# Altium PCB PCB1.PcbDoc
Units mm, origin at the board's own origin, x right, y up, seen from the top; angles counter-clockwise.
Board outline 44.15 x 26.07 mm, 2 copper layers (Top Layer, Bottom Layer); 33 components, 28 nets, 109 pads, 16 vias.
Unrouted connection lines stored in the file: 23.
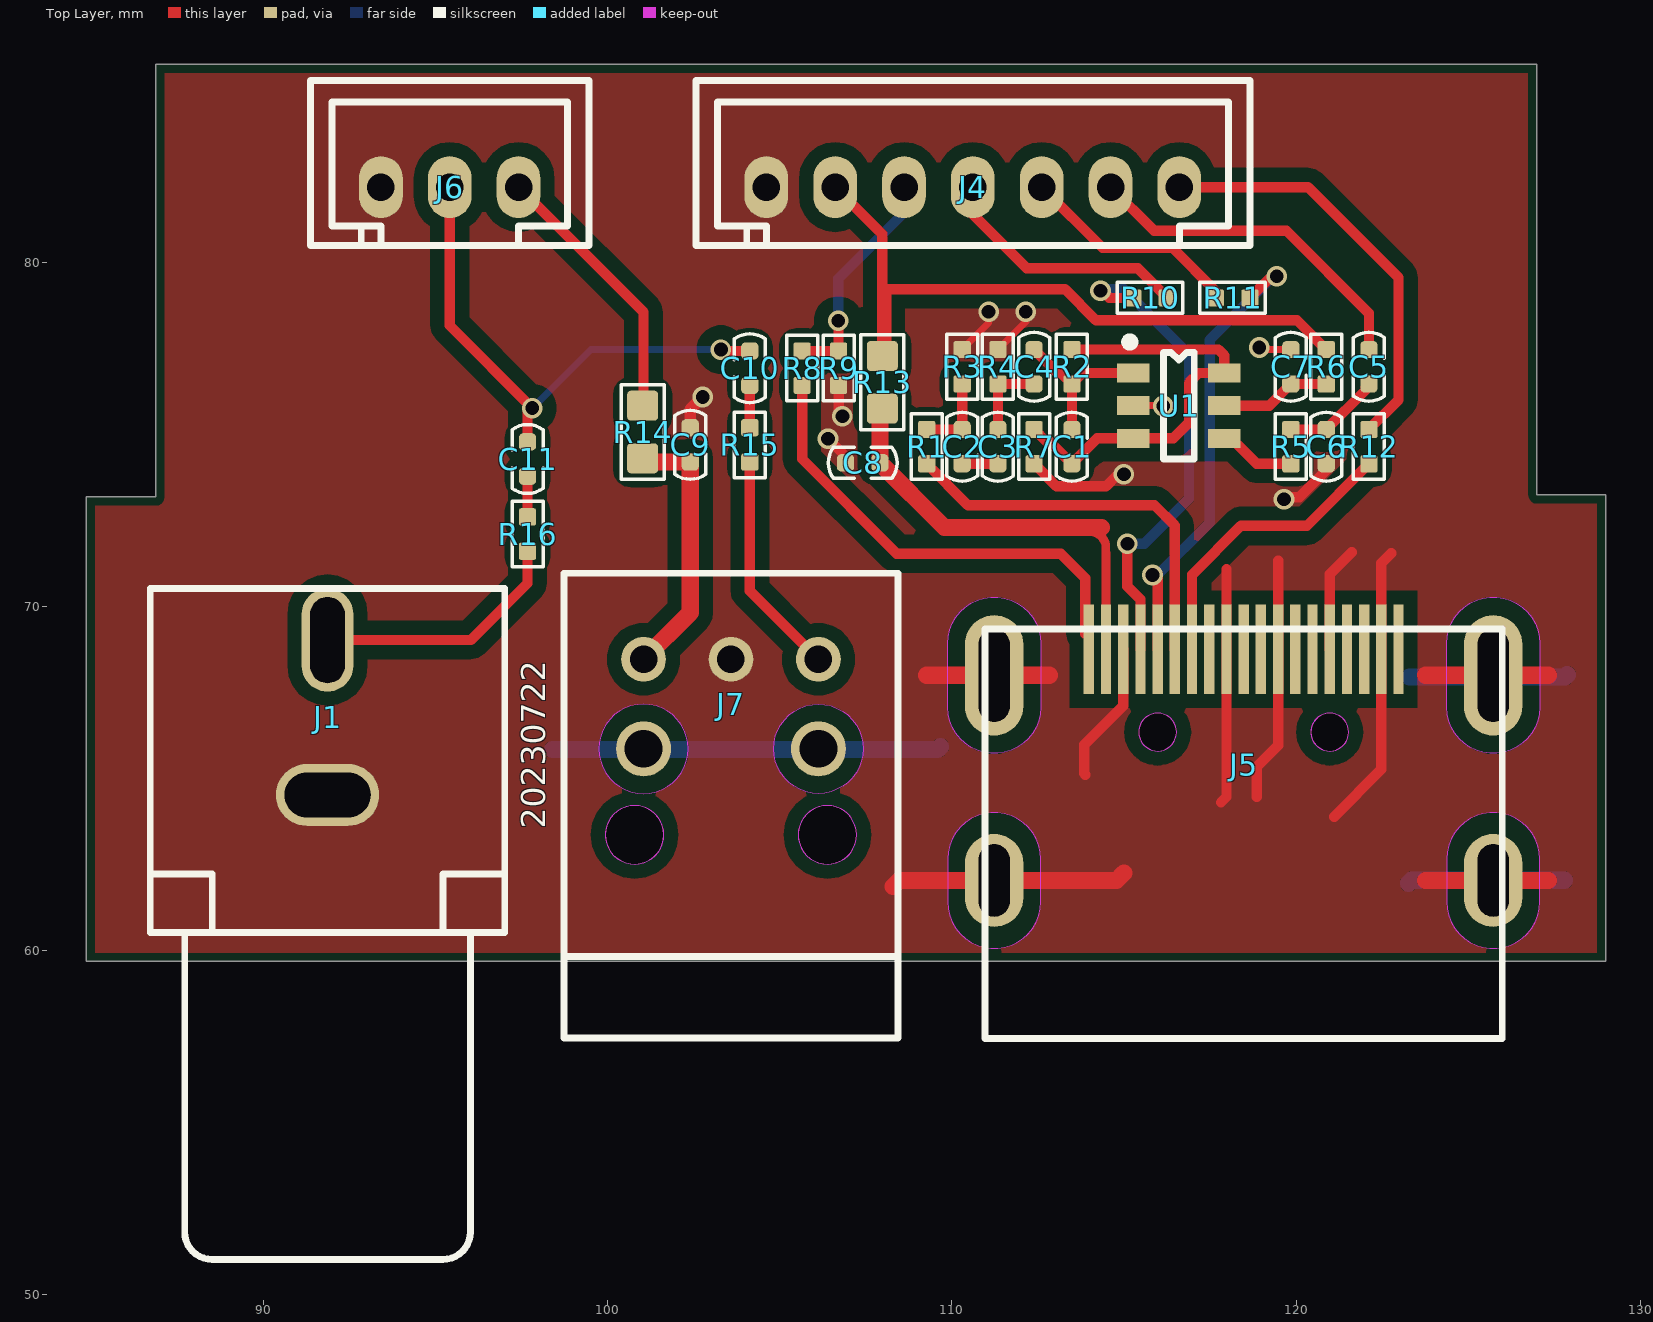
[diagram p0: Top Layer view]
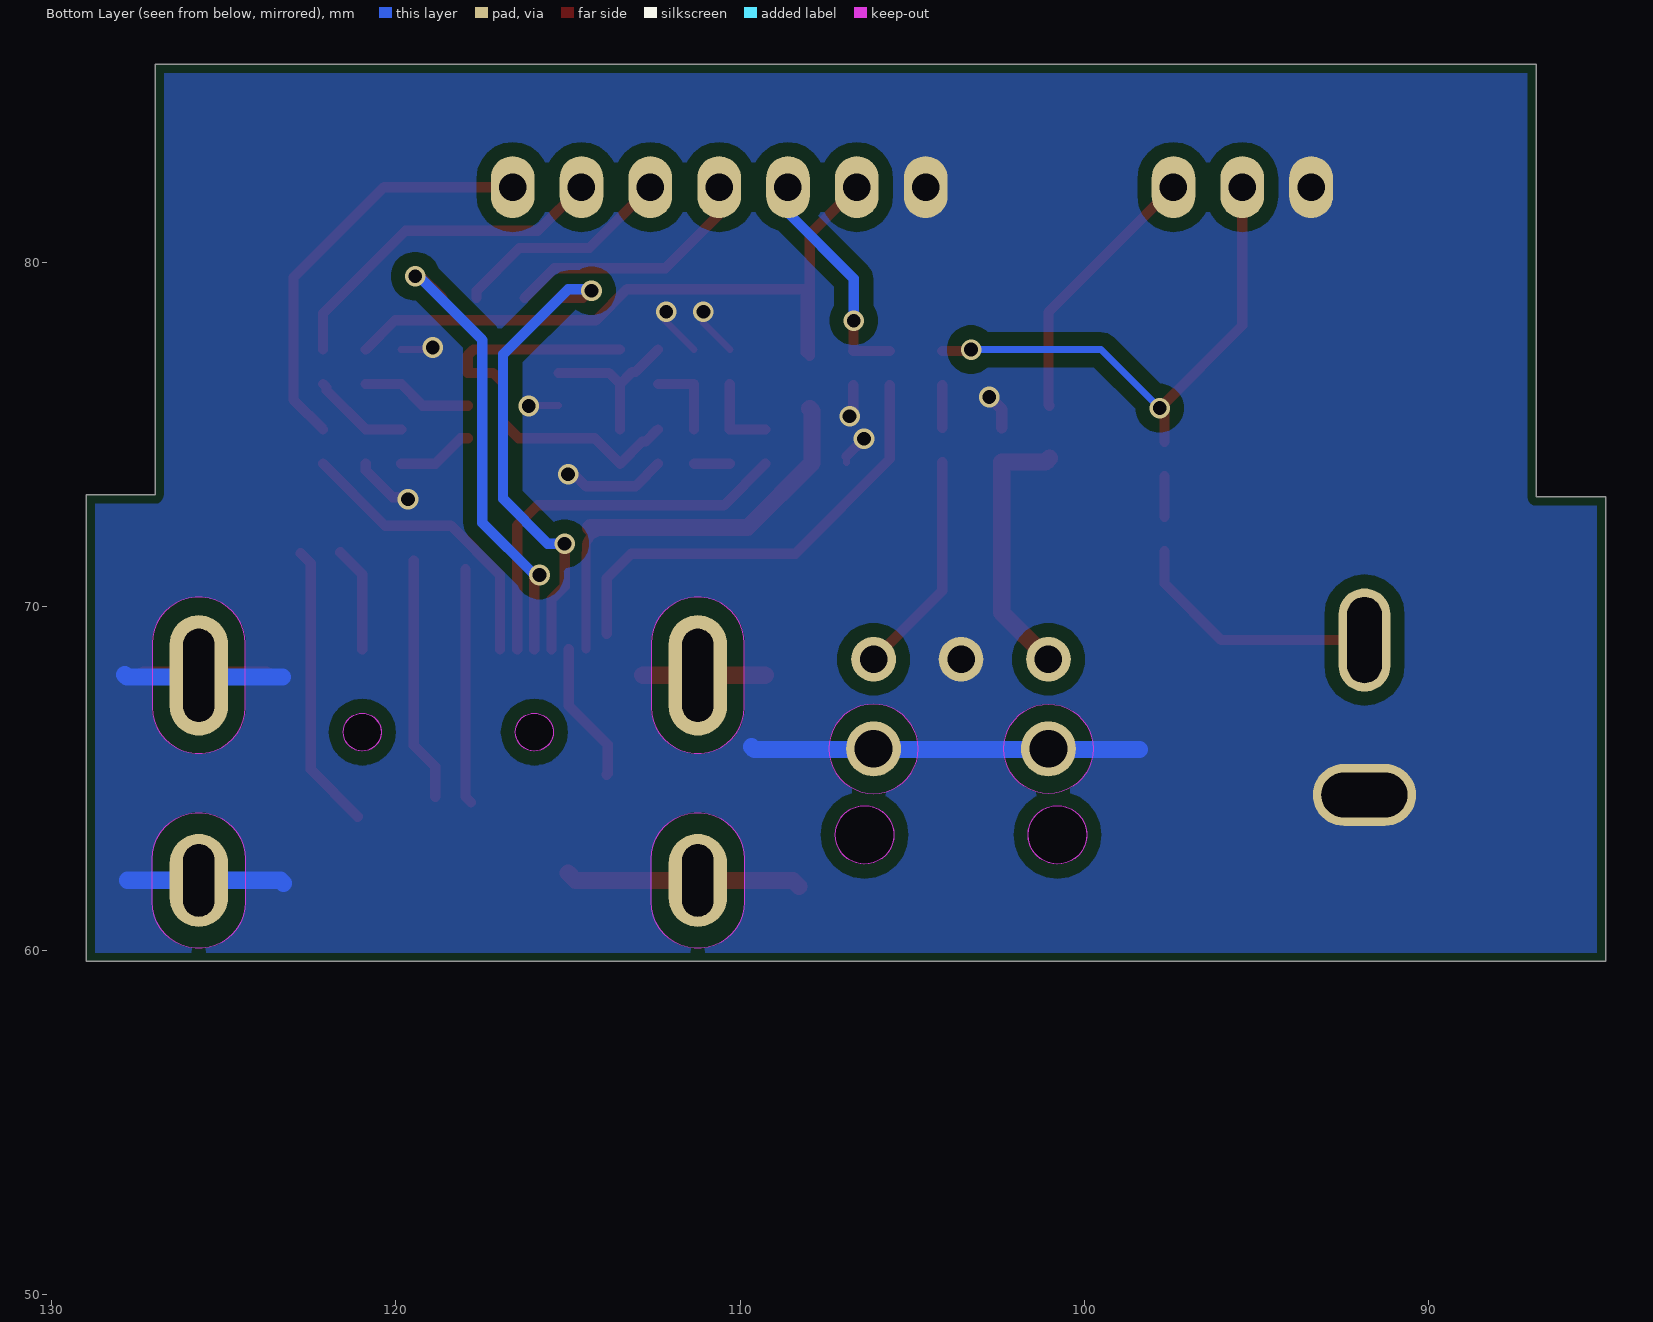
[diagram p1: Bottom Layer view, seen from below]

## Layer stack, top to bottom
Top Solder: solder mask 0.0102, Solder Resist, Dk 3.5
Top Layer: signal copper 0.0356
Dielectric 1: dielectric 0.32, FR-4, Dk 4.8
Bottom Layer: signal copper 0.0356
Bottom Solder: solder mask 0.0102, Solder Resist, Dk 3.5

## Board outline
84.849,61.09 84.849,73.19 86.87,73.19 86.87,85.76 126.999,85.76 126.999,73.25 128.999,73.25 128.999,59.69 84.849,59.69

## Design rules (kind name [scope] priority, off if disabled: settings)
BoardOutlineClearance [All] p1: gap=0.254 ignorepadtopadclearanceinfootprint=FALSE except(0: Arc-SplitContinuation Track-SplitContinuation SMDPad-SplitContinuation THPad-SplitContinuation Via-SplitContinuation Fill-SplitContinuation Poly-SplitContinuation Region-SplitContinuation Text-SplitContinuation)
Clearance Clearance_1 [InPolygon] p1: gap=0.4 ignorepadtopadclearanceinfootprint=TRUE
Clearance [All] p2: gap=0.2 ignorepadtopadclearanceinfootprint=TRUE
ComponentClearance [All] p1: gap=0 collisioncheckmode=3 verticalgap=0 showdistances=FALSE
HoleSize [All] p1: absolutevalues=TRUE maxlimit=3.5 minlimit=0.3 maxpercent=80.000 minpercent=20.000
MinimumSolderMaskSliver [All] p1: minsoldermaskwidth=0.1
PolygonConnect [All] p1: connectstyle=Direct reliefconductorwidth=0.254 reliefentries=4 polygonreliefangle="90 Angle" airgapwidth=0.254
RoutingVias [All] p1: holewidth=0.4 width=0.6 viastyle="Through Hole" minholewidth=0.4 minwidth=0.6 maxholewidth=0.5 maxwidth=0.7
SilkToSolderMaskClearance [IsPad] p1: minsilkscreentomaskgap=0 clearancetoexposedcopper=TRUE
SolderMaskExpansion [All] p1: expansion=0.102 istentingtop=FALSE
Width [All] p1: maxlimit=2 minlimit=0.2 preferedwidth=0.5
26 further rules are at their usual default settings.

## Components (designator, comment, footprint, x,y, rotation, side; value= is the part's Value field where it differs from the comment)
C1 "NC" C0402 113.489,74.65 r270 top
C2 "104" C0402 110.299,74.65 r270 top
C3 "104" C0402 111.339,74.65 r90 top
C4 "104" C0402 112.389,76.97 r90 top
C5 "105" C0402 122.119,76.97 r90 top
C6 "NC" C0402 120.879,74.65 r270 top
C7 "105" C0402 119.849,76.97 r90 top
C8 "105" C0402 107.409,74.18 r0 top
C9 "105" C0402 102.399,74.7 r90 top
C10 "0R" C0402 104.129,76.93 r90 top
C11 "0R" C0402 97.67,74.29 r90 top
J1 "RCA Jack" "rca jack right angle" 91.859,64.53 r0 top
J4 "CON-6P-2.0" "header 7 pin" 116.61,82.19 r180 top
J5 "HDMI" HDMI_CONN 113.979,68.765 r0 top
J6 "CON-3P-2.0" "Header 3 pin" 95.41,82.19 r180 top
J7 "OPTICAL RECEIVER" "OPTICAL LINK" 103.582,68.47 r0 top
R1 "0R" R0402 109.269,74.65 r90 top
R2 "100K" R0402 113.489,76.97 r270 top
R3 "100K" R0402 110.299,76.97 r90 top
R4 "100K" R0402 111.339,76.97 r90 top
R5 "1K" R0402 119.849,74.65 r270 top
R6 "1R" R0402 120.879,76.97 r270 top
R7 "47K" R0402 112.389,74.65 r270 top
R8 "NC" R0402 105.649,76.93 r270 top
R9 "NC" R0402 106.709,76.93 r270 top
R10 "0R" R0402 115.759,78.97 r180 top
R11 "0R" R0402 118.159,78.97 r0 top
R12 "0R" R0402 122.119,74.65 r90 top
R13 "1R" R0603 107.979,76.52 r90 top
R14 "FB" R0603 101.014,75.075 r270 top
R15 "0R" R0402 104.129,74.7 r90 top
R16 "0R" R0402 97.67,72.11 r90 top
U1 "SN74LVC2G04" SOT-6N 115.269,76.79 r0 top

## Footprints (in the part's own frame and the unit in brackets; to place one, negate y for a bottom-side part, rotate by r counter-clockwise, add the part's x,y. Pads: shape width x height; smd on the part's side, far side on the other; paste and mask are expansions set on the pad)
C0402 [mm]
  rrect50% 0.5x0.5 smd mask+0.05: 1(-0.5,0) 2(0.5,0)
  silkscreen extent -1,-0.45 1,0.45
HDMI_CONN [mm]
  rect 0.3x2.6 smd mask+0.025: 1(9,0) 2(8.5,0) 3(8,0) 4(7.5,0) 5(7,0) 6(6.5,0) 7(6,0) 8(5.5,0) 9(5,0) 10(4.5,0) 11(4,0) 12(3.5,0) 13(3,0) 14(2.5,0) 15(2,0) 16(1.5,0) 17(1,0) 18(0.5,0) 19(0,0)
  oval 1.7x3.5 hole 0.9 slot 2.7 at 90 deg: 20(-2.75,-0.76) 22(11.75,-0.76)
  oval 1.7x2.7 hole 0.9 slot 2.1 at 90 deg: 21(-2.75,-6.72) 23(11.75,-6.72)
  Keep-Out Layer board cut-out: 1.45,-2.41 1.492,-2.62 1.611,-2.799 1.79,-2.918 2,-2.96 2,-2.96 2.21,-2.918 2.389,-2.799 2.508,-2.62 2.55,-2.41 2.55,-2.41 2.508,-2.2 2.389,-2.021 2.21,-1.902 2,-1.86 2,-1.86 1.79,-1.902 1.611,-2.021 1.492,-2.2 1.45,-2.41
  Keep-Out Layer board cut-out: 6.45,-2.41 6.492,-2.62 6.611,-2.799 6.79,-2.918 7,-2.96 7,-2.96 7.21,-2.918 7.389,-2.799 7.508,-2.62 7.55,-2.41 7.55,-2.41 7.508,-2.2 7.389,-2.021 7.21,-1.902 7,-1.86 7,-1.86 6.79,-1.902 6.611,-2.021 6.492,-2.2 6.45,-2.41
  Keep-Out Layer pour cut-out: -4.1,-1.685 -4.1,0.165 -3.966,0.751 -3.592,1.22 -3.05,1.481 -2.45,1.481 -1.908,1.22 -1.534,0.751 -1.4,0.165 -1.4,0.165 -1.4,-1.685 -1.534,-2.271 -1.908,-2.74 -2.45,-3.001 -3.05,-3.001 -3.592,-2.74 -3.966,-2.271 -4.1,-1.685
  Keep-Out Layer pour cut-out: 10.4,-1.685 10.4,0.165 10.534,0.751 10.908,1.22 11.45,1.481 12.05,1.481 12.592,1.22 12.966,0.751 13.1,0.165 13.1,0.165 13.1,-1.685 12.966,-2.271 12.592,-2.74 12.05,-3.001 11.45,-3.001 10.908,-2.74 10.534,-2.271 10.4,-1.685
  Keep-Out Layer pour cut-out: -4.1,-7.345 -3.966,-7.931 -3.592,-8.4 -3.05,-8.661 -2.45,-8.661 -1.908,-8.4 -1.534,-7.931 -1.4,-7.345 -1.4,-7.345 -1.4,-6.095 -1.534,-5.509 -1.908,-5.04 -2.45,-4.779 -3.05,-4.779 -3.592,-5.04 -3.966,-5.509 -4.1,-6.095 -4.1,-6.095
  Keep-Out Layer pour cut-out: 10.4,-7.345 10.534,-7.931 10.908,-8.4 11.45,-8.661 12.05,-8.661 12.592,-8.4 12.966,-7.931 13.1,-7.345 13.1,-7.345 13.1,-6.095 12.966,-5.509 12.592,-5.04 12.05,-4.779 11.45,-4.779 10.908,-5.04 10.534,-5.509 10.4,-6.095 10.4,-6.095
  Keep-Out Layer circle w0.025: c2,-2.41 r0.55
  Keep-Out Layer circle w0.025: c7,-2.41 r0.55
  silkscreen extent -3.01,-11.31 12.01,0.58
"Header 3 pin" [mm]
  oval 1.27x1.8 hole 0.8: 1(-2,0) 2(0,0) 3(2,0)
  silkscreen extent -4.05,-3.1 4.05,1.7
"header 7 pin" [mm]
  oval 1.27x1.8 hole 0.8: 1(0,0) 2(2,0) 3(4,0) 4(6,0) 5(8,0) 6(10,0) 7(12,0)
  silkscreen extent -2.05,-3.1 14.05,1.7
"OPTICAL LINK" [mm]
  round 1.3 hole 0.8: 1(2.54,0) 2(0,0) 3(-2.54,0)
  round 1.6 hole 1.1: 4(-2.54,-2.6) 5(2.54,-2.6)
  Keep-Out Layer board cut-out: 1.95,-5.1 2.015,-5.425 2.199,-5.701 2.475,-5.885 2.8,-5.95 2.8,-5.95 3.125,-5.885 3.401,-5.701 3.585,-5.425 3.65,-5.1 3.65,-5.1 3.585,-4.775 3.401,-4.499 3.125,-4.315 2.8,-4.25 2.8,-4.25 2.475,-4.315 2.199,-4.499 2.015,-4.775 1.95,-5.1
  Keep-Out Layer board cut-out: -3.65,-5.1 -3.585,-5.425 -3.401,-5.701 -3.125,-5.885 -2.8,-5.95 -2.8,-5.95 -2.475,-5.885 -2.199,-5.701 -2.015,-5.425 -1.95,-5.1 -1.95,-5.1 -2.015,-4.775 -2.199,-4.499 -2.475,-4.315 -2.8,-4.25 -2.8,-4.25 -3.125,-4.315 -3.401,-4.499 -3.585,-4.775 -3.65,-5.1
  Keep-Out Layer pour cut-out: 3.84,-2.6 3.741,-3.097 3.459,-3.519 3.037,-3.801 2.54,-3.9 2.54,-3.9 2.043,-3.801 1.621,-3.519 1.339,-3.097 1.24,-2.6 1.24,-2.6 1.339,-2.103 1.621,-1.681 2.043,-1.399 2.54,-1.3 2.54,-1.3 3.037,-1.399 3.459,-1.681 3.741,-2.103 3.84,-2.6
  Keep-Out Layer pour cut-out: -3.84,-2.6 -3.741,-3.097 -3.459,-3.519 -3.037,-3.801 -2.54,-3.9 -2.54,-3.9 -2.043,-3.801 -1.621,-3.519 -1.339,-3.097 -1.24,-2.6 -1.24,-2.6 -1.339,-2.103 -1.621,-1.681 -2.043,-1.399 -2.54,-1.3 -2.54,-1.3 -3.037,-1.399 -3.459,-1.681 -3.741,-2.103 -3.84,-2.6
  Keep-Out Layer circle w0.025: c2.8,-5.1 r0.85
  Keep-Out Layer circle w0.025: c-2.8,-5.1 r0.85
  silkscreen extent -4.85,-11 4.85,2.5
R0402 [mm]
  rrect25% 0.5x0.5 smd mask+0.05: 1(-0.5,0) 2(0.5,0)
  silkscreen extent -0.95,-0.45 0.95,0.45
R0603 [mm]
  rrect25% 0.87x0.9 smd: 1(-0.765,0) 2(0.765,0)
  silkscreen extent -1.38,-0.63 1.38,0.63
"rca jack right angle" [mm]
  oval 3x1.8 hole 1.3 slot 2.5 at 0 deg: 1(0,0)
  oval 1.5x3 hole 1 slot 2.5 at 90 deg: 2(0,4.5)
  silkscreen extent -5.15,-13.5 5.15,6
SOT-6N [mm] "SOT23, 6-Leads, Body 2.90x2.80mm, Pitch 0.95mm, IPC Medium Density"
  rect 0.95x0.55 smd mask+0.051: 1(0,0) 2(0,-0.95) 3(0,-1.9) 4(2.65,-1.9) 5(2.65,-0.95) 6(2.65,0)
  silkscreen extent -0.22,-2.5 1.78,1.02

## Part data
C1 C2 C3 C4 C5 C6 C7 C8 C9 C10 C11: library part CAP, "VISHAY", Category=Capacitors
J1: "RCA JACK"
J4: library part "HEADER 7", "7 PIN, header", Category=Capacitors
J5: library part hdmi-corr
J6: library part "HEADER 3", "3 PIN, header", Category=Capacitors
J7: library part "OPTICAL R", "OPTICAL CONNECTOR"
R1 R2 R3 R4 R5 R6 R7 R8 R9 R10 R11 R12 R13 R14 R15 R16: library part RES, "VISHAY", Category=Resistors
U1: library part doubleNAND, "SN74LVC2G04 double nand gate"

## Free pads (board coordinates)
  round 0.8 on Mech1: 5(103.582,68.47) 6(101.042,68.47) 7(106.122,68.47)
  round 1.1 on Mech1: 8(106.122,65.87) 9(101.042,65.87)
  oval 0.9x2.7 on Mech1: 10(111.229,68.005) 10(125.729,68.005)
  oval 0.9x2.1 on Mech1: 11(111.229,62.045) 11(125.729,62.045)

## Via types
v1: diameter 0.6, hole 0.4, Top Layer to Bottom Layer, tented both sides, 16 vias

## Nets (pads, with @x,y where several pads share a name; then routed paths per layer and width w, separated by ;. In a path a pad name is that pad's centre, name@x,y a point inside that pad or via, vN(x,y) a via of type N, cw(c..) or ccw(c..) an arc to the next point about the centre after c; other vN are vias at no path point)
ARC: J5.14 R1.1 | length 11.5
  Top Layer w0.3: R1.1 110.468,72.951 115.888,72.951 116.479,72.36 116.479,71.243 116.479,70.597 J5.14
ARCF: C5.2 J4.2 | length 10.1
  Top Layer w0.3: J4.2 115.879,80.921 119.723,80.921 122.119,78.525 C5.2
CEC: J4.1 R12.2 | length 12.2
  Top Layer w0.3: J4.1 120.35,82.19 122.979,79.561 122.979,76.01 R12.2
DECT: J5.19 R8.2 | length 13.4
  Top Layer w0.3: R8.2 105.649,74.29 108.399,71.54 113.169,71.54 113.879,70.83 J5.19@113.879,69.217
DECT1: J4.5 R8.1 R9.1 | length 6.6
  Top Layer w0.3: R8.1 106.699,77.43 R9.1@106.704,77.435 ; v1(106.699,78.31) 106.704,78.305 R9.1@106.704,77.435 ; R9.1 R9.1@106.704,77.435
  Bottom Layer w0.3: v1(106.699,78.31) 106.699,79.529 108.61,81.44 J4.5
GND: C6.2 C7.2 C8.1 C9.2 J1.1 J4.7 J5.2 J5.5 J5.8 J5.11 J5.17 J5.20 J5.21 J5.22 J5.23 J6.3 J7.2 J7.4 J7.5 R3.2 R4.2 R7.2 R9.2 U1.2 | length 79.7
  Top Layer w0.2: v1@106.709,75.64 v1(106.819,75.53) ; C8.1 C8.1@106.909,74.37 ; R3.2 111.068,78.239 v1(111.068,78.57) ; R4.2 112.149,78.28 v1(112.149,78.57) ; U1.2 116.129,75.84 v1(116.139,75.83) ; v1(118.929,77.53) 118.989,77.47 C7.2
  Top Layer w0.3: v1(106.399,74.88) C8.1@106.909,74.37 ; v1@106.709,75.64 R9.2 ; R7.2 113.038,73.501 114.48,73.501 v1@114.799,73.82 ; 113.879,65.12 113.849,65.15 113.849,65.99 114.979,67.12 J5.17 ; 117.819,64.31 117.979,64.47 J5.11 117.979,71.09 ; 118.859,64.47 118.859,65.35 119.479,65.97 J5.8 119.479,71.33 ; v1(119.649,73.12) 119.706,73.177 120.096,73.177 120.879,73.96 C6.2 ; J5.5 120.979,70.94 121.619,71.58 ; 121.109,63.9 122.479,65.27 J5.2 122.479,71.26 122.769,71.55
  Top Layer w0.34: C9.2 102.399,75.731 v1(102.758,76.091)
  Top Layer w0.5: 108.289,61.87 108.464,62.045 J5.21 114.784,62.045 114.999,62.26 ; 109.269,68.005 J5.20 112.829,68.005 ; 123.769,62.045 J5.23 127.329,62.045 ; 123.769,68.005 J5.22 127.329,68.005
  Bottom Layer w0.5: 98.4,65.847 109.586,65.847 109.669,65.93 ; 123.269,61.962 123.357,62.05 127.8,62.05 ; 123.3,67.96 127.819,67.96 127.879,68.02
  other v1: 114.999,73.85
HDVDD: C8.2 J5.18 R13.1 | length 12.5
  Top Layer w0.254: 114.004,72.181 cw(c114.004,71.705) 114.473,71.788 114.473,71.57 114.479,71.564 J5.18
  Top Layer w0.5: R13.1 107.909,75.685 C8.2 109.788,72.301 114.349,72.301
HDVDD1: J4.6 R6.1 R13.2 | length 21
  Top Layer w0.3: J4.6 107.979,80.821 107.979,79.22 107.979,77.396 R13.2 108.09,77.396 108.09,79.22 113.288,79.22 114.187,78.321 120.028,78.321 R6.1
NAND1-V: C7.1 R6.2 U1.5 | length 3.2
  Top Layer w0.3: U1.5 119.219,75.84 C7.1 R6.2
NetC1_1: C1.1 C4.2 R2.2 U1.1 | length 4.7
  Top Layer w0.3: C4.2 113.038,76.821 113.138,76.821 R2.2 ; C1.1 R2.2 ; U1.1 113.809,76.79 R2.2
NetC2_1: C2.1 R1.2 R3.1 | length 2.4
  Top Layer w0.3: R1.2 C2.1 R3.1
NetC2_2: C2.2 C3.1 | length 1
  Top Layer w0.3: C2.2 C3.1
NetC3_2: C3.2 C4.1 R4.1 | length 2.4
  Top Layer w0.3: C3.2 R4.1 C4.1
NetC5_1: C5.1 C6.1 R5.1 | length 2.9
  Top Layer w0.3: R5.1 C6.1 122.019,76.29 122.019,76.37 C5.1
NetC10_1: C10.1 R15.2 | length 1.2
  Top Layer w0.3: R15.2 C10.1
NetC11_1: C11.1 R16.2 | length 1.2
  Top Layer w0.3: R16.2 C11.1
NetJ1_2: J1.2 R16.1 | length 7.4
  Top Layer w0.3: J1.2 96.02,69.03 97.67,70.68 R16.1
NetJ5_13: J5.13 R12.1 | length 8.6
  Top Layer w0.3: J5.13 116.979,70.389 116.979,70.93 118.399,72.35 120.319,72.35 R12.1
NetR5_2: R5.2 U1.4 | length 2.2
  Top Layer w0.3: U1.4 118.119,74.89 118.859,74.15 R5.2
OPT-V+: J6.1 R14.1 | length 7.9
  Top Layer w0.3: J6.1 101.042,78.558 101.042,75.868 R14.1
OPT-VDD: C9.1 J7.3 R14.2 | length 7.7
  Top Layer w0.5: R14.2 101.124,74.2 C9.1 102.399,69.827 J7.3
SCL: J5.15 R11.2 | length 13.8
  Top Layer w0.2: v1(115.829,70.92) 115.883,70.92 115.969,70.92 v1@115.979,70.91
  Top Layer w0.3: v1(115.829,70.92) 115.883,70.92 115.893,70.91 115.979,70.91 J5.15 ; R11.2 119.289,79.6 v1(119.44,79.6)
  Bottom Layer w0.3: v1(115.829,70.92) 115.883,70.92 115.969,70.92 117.489,72.44 117.489,77.75 119.339,79.6 v1(119.44,79.6)
SCL1: J4.3 R11.1 | length 6.5
  Top Layer w0.3: J4.3 114.379,80.421 116.418,80.421 117.659,79.18 R11.1
SDA: J5.16 R10.2 | length 14.2
  Top Layer w0.3: v1(114.32,79.18) 114.34,79.2 114.57,78.97 R10.2 ; v1(115.1,71.83) 115.1,70.596 115.479,70.217 J5.16
  Bottom Layer w0.3: v1(114.32,79.18) 114.32,79.22 114.999,79.22 116.889,77.33 116.889,73.13 115.589,71.83 v1(115.1,71.83)
SDA1: J4.4 R10.1 | length 7.4
  Top Layer w0.3: J4.4 110.61,81.4 112.18,79.83 115.399,79.83 R10.1
SPDIF: C10.2 C11.2 J6.2 | length 15.5
  Top Layer w0.2: v1(103.289,77.47) v1@103.329,77.43
  Top Layer w0.3: J6.2 95.41,78.17 v1(97.81,75.77) 97.67,75.63 C11.2 ; v1@103.329,77.43 C10.2
  Bottom Layer w0.2: v1(97.81,75.77) 99.51,77.47 v1(103.289,77.47)
SPDIF1: J7.1 R15.1 | length 6.6
  Top Layer w0.3: R15.1 104.129,70.463 J7.1
WIR1: C1.2 R2.1 R7.1 U1.3 U1.6 | length 12.7
  Top Layer w0.3: R7.1 112.74,74.799 112.84,74.799 C1.2 114.229,74.89 U1.3 116.429,74.89 116.889,75.35 116.889,76.5 117.179,76.79 U1.6 117.919,77.3 117.749,77.47 R2.1
pads on no net: J5.1 J5.3 J5.4 J5.6 J5.7 J5.9 J5.10 J5.12

## Polygon pours and split planes (outlines as drawn)
GND on Top Layer "GND_L01_P000" (solid, remove dead copper, pour order 0): 84.849,61.09 84.849,73.19 86.87,73.19 86.87,85.76 126.999,85.76 126.999,73.25 128.999,73.25 128.999,59.69 84.849,59.69
GND on Bottom Layer "GND_L02_P001" (solid, remove dead copper, pour order 1): 84.849,61.09 84.849,73.19 86.87,73.19 86.87,85.76 126.999,85.76 126.999,73.25 128.999,73.25 128.999,59.69 84.849,59.69

## Keep-outs
Keep-Out Layer:
  lines w0.025: 99.932,63.37 cw(c100.782,63.37) 100.782,64.22 cw(c100.782,63.37) 101.632,63.37 cw(c100.782,63.37) 100.782,62.52 cw(c100.782,63.37) 99.932,63.37 ; 105.532,63.37 cw(c106.382,63.37) 106.382,64.22 cw(c106.382,63.37) 107.232,63.37 cw(c106.382,63.37) 106.382,62.52 cw(c106.382,63.37) 105.532,63.37 ; 115.429,66.355 cw(c115.979,66.355) 115.979,66.905 cw(c115.979,66.355) 116.529,66.355 cw(c115.979,66.355) 115.979,65.805 cw(c115.979,66.355) 115.429,66.355 ; 120.429,66.355 cw(c120.979,66.355) 120.979,66.905 cw(c120.979,66.355) 121.529,66.355 cw(c120.979,66.355) 120.979,65.805 cw(c120.979,66.355) 120.429,66.355

## Silkscreen, mask and mechanical layers (free items; w line width, h text height)
Top Overlay:
  text "20230722" at 98.18,63.54 h0.7 r90
Mechanical 1:
  lines w0.1: 86.849,73.19 84.849,73.19 84.849,59.69 95.729,59.69 128.999,59.69 128.999,73.19 ; 86.87,73.19 86.87,74.755 86.87,77.24 86.87,84.195 86.87,85.76 126.999,85.76 126.999,73.25 126.999,73.22 128.999,73.22
Top Assembly:
  text "print date: 20231006" at 97.029,73.55 h0.6 r90